# Altium PCB PCB1.PcbDoc (part 3 of 12)
Units mm, origin at the board's own origin, x right, y up, seen from the top; angles counter-clockwise.
Board outline 122.17 x 121.67 mm, 2 copper layers (Top Layer, Bottom Layer); 274 components, 225 nets, 941 pads, 421 vias.
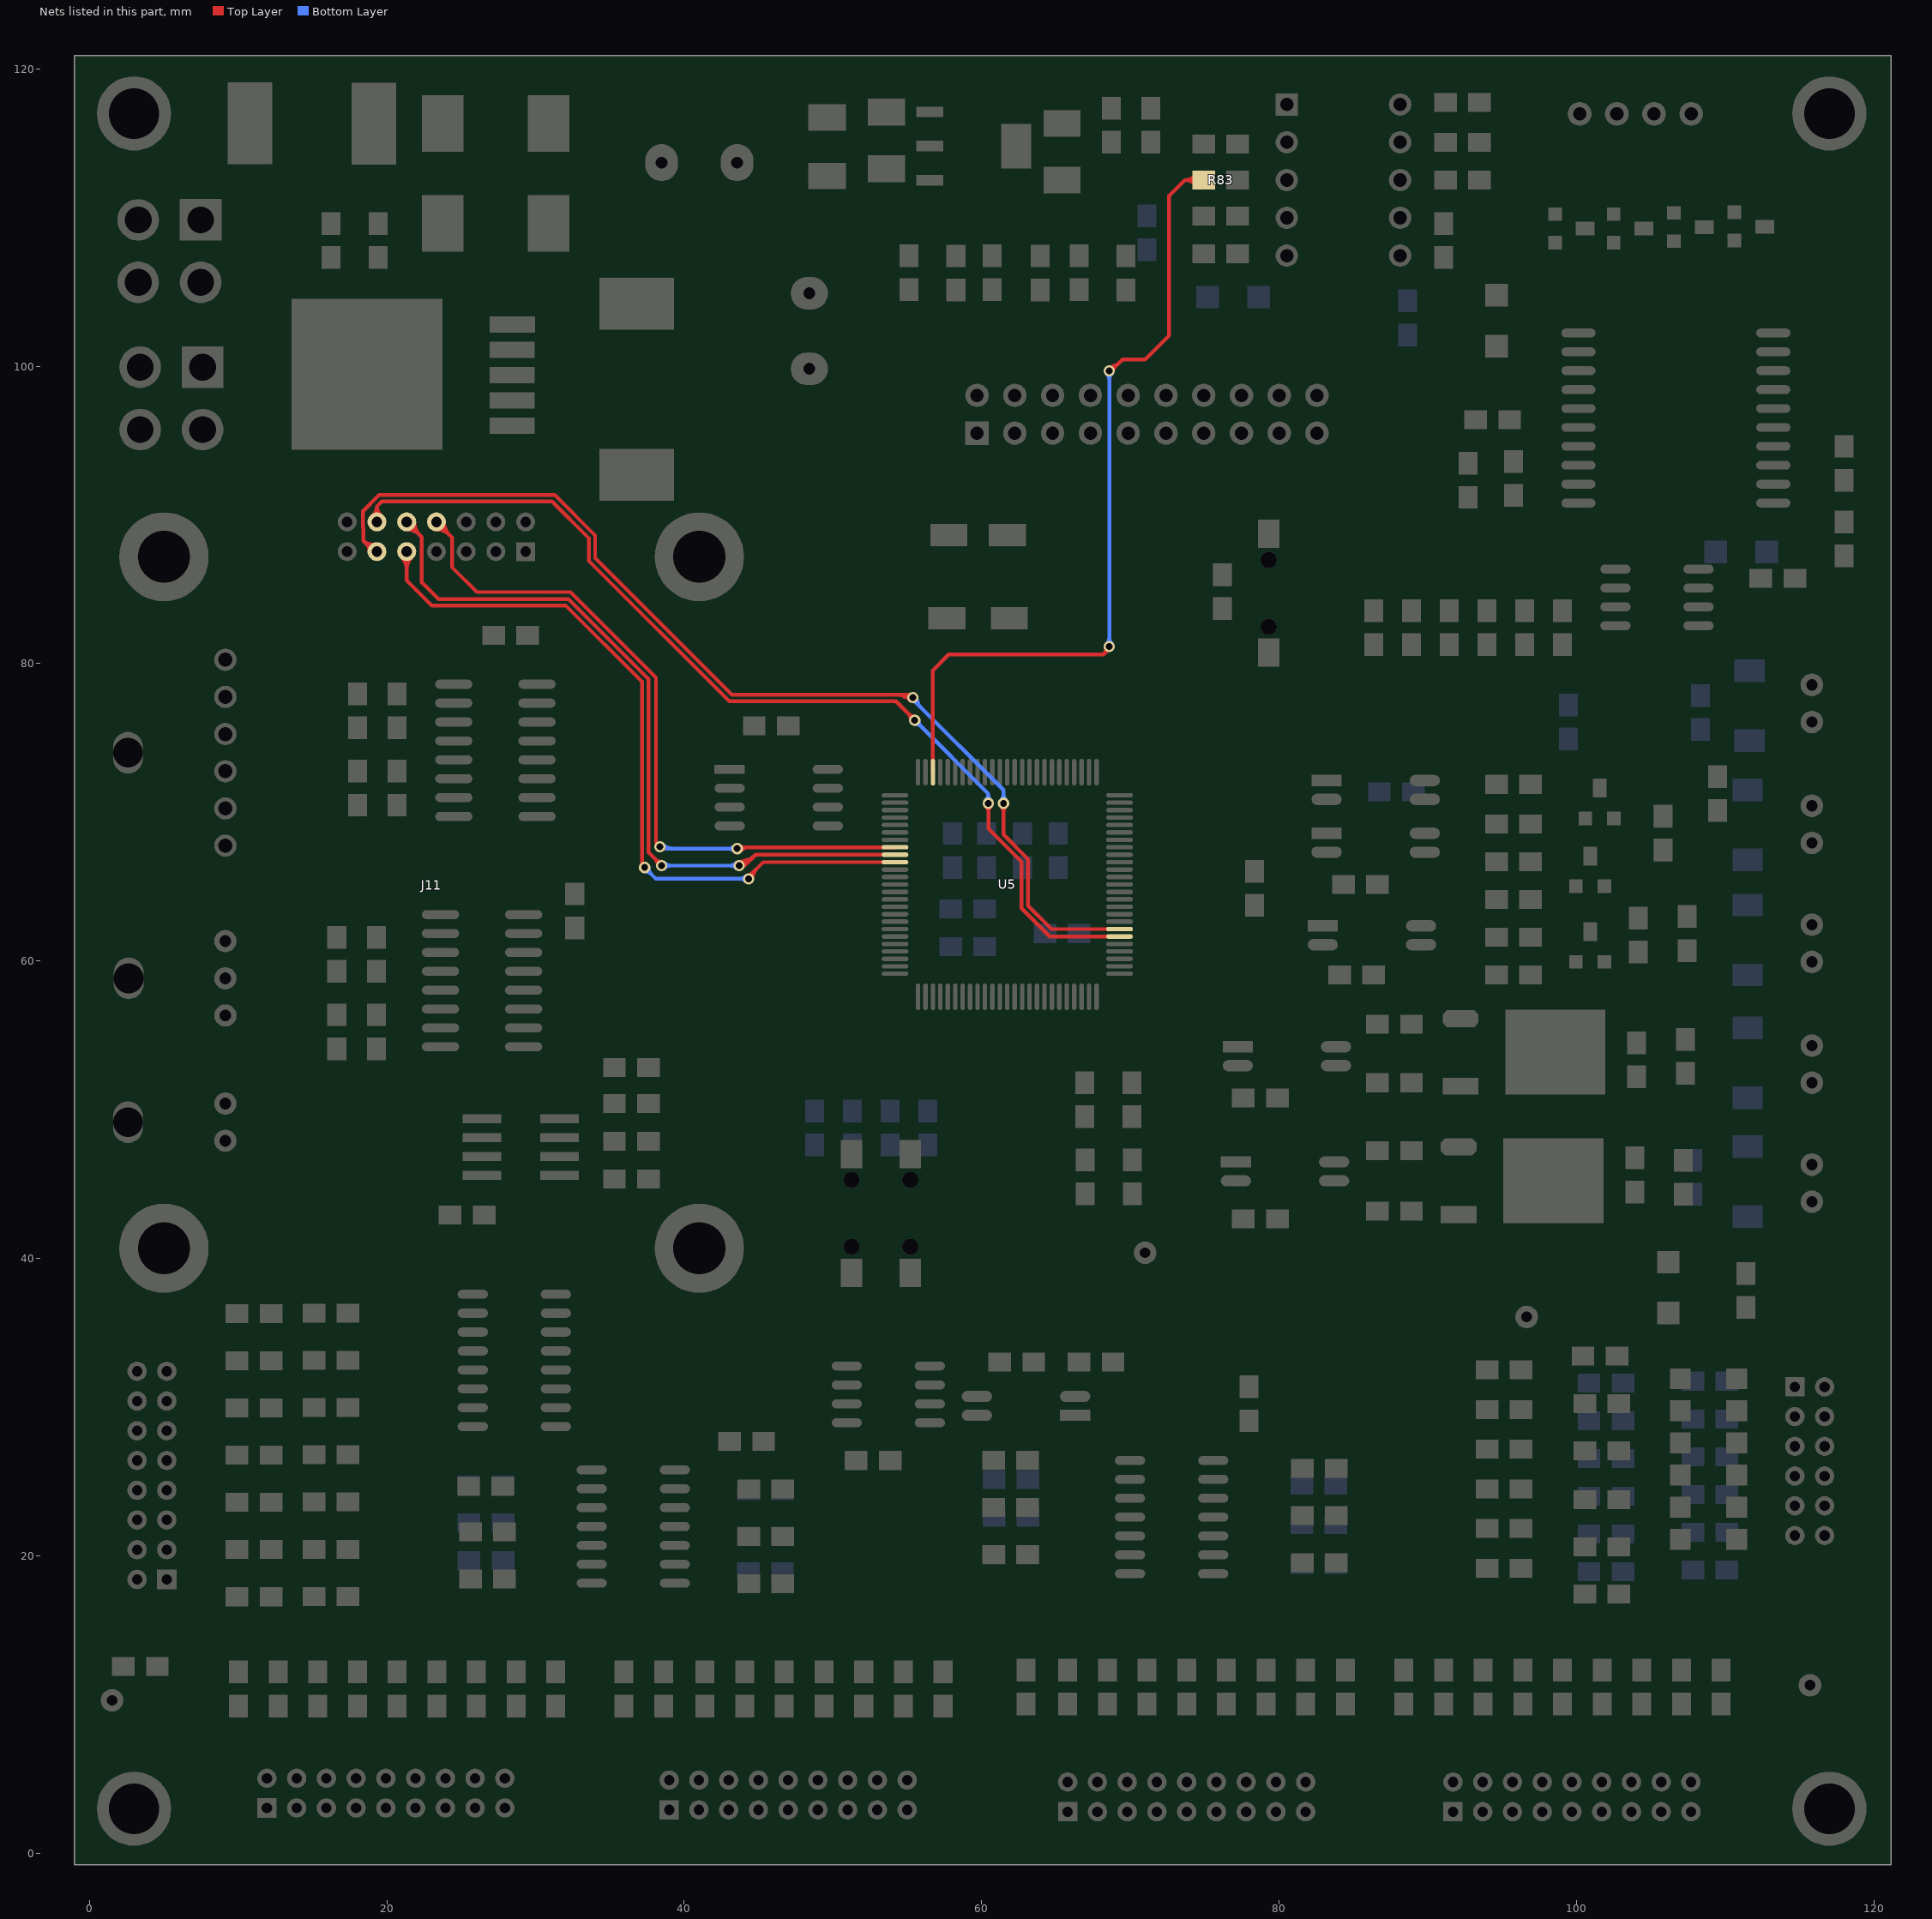
[diagram p3: the nets of this part, all layers, seen from the top]

## Via types
v1: diameter 0.762, hole 0.457, Top Layer to Bottom Layer, 339 vias
v2: diameter 1.27, hole 0.457, Top Layer to Bottom Layer, 39 vias
v3: diameter 0.889, hole 0.457, Top Layer to Bottom Layer, 21 vias
v4: diameter 1.27, hole 0.711, Top Layer to Bottom Layer, 12 vias
v5: diameter 1.524, hole 0.711, Top Layer to Bottom Layer, 5 vias
v6: diameter 1.016, hole 0.457, Top Layer to Bottom Layer, 3 vias
v7: diameter 0.711, hole 0.457, Top Layer to Bottom Layer, 1 vias
v8: diameter 1.524, hole 0.457, Top Layer to Bottom Layer, 1 vias

## Nets (pads, with @x,y where several pads share a name; then routed paths per layer and width w, separated by ;. In a path a pad name is that pad's centre, name@x,y a point inside that pad or via, vN(x,y) a via of type N, cw(c..) or ccw(c..) an arc to the next point about the centre after c; other vN are vias at no path point) (continued)
G: R83.1 U5.23 | length 78.9
  Top Layer w0.254: U5.23@56.722,72.701 56.722,79.557 57.785,80.62 68.199,80.62 ; v1@68.58,81.001 68.199,80.62 ; v1@68.58,99.568 69.469,100.457 70.993,100.457 72.593,102.057 72.593,111.455 73.66,112.522 ; R83.1@74.93,112.522 73.66,112.522 ; 68.199,80.62 ccw(c67.842,80.976) v1@68.333,81.094 ; 68.199,80.62 ccw(c67.842,80.976) v1@68.333,81.094 ; 68.199,80.62 ccw(c67.842,80.976) v1@68.333,81.094 ; 68.199,80.62 ccw(c67.842,80.976) v1@68.333,81.094 ; v1(68.58,99.695) cw(c69.126,99.492) 68.975,100.055 ; v1(68.58,99.695) cw(c69.126,99.492) 68.975,100.055 ; v1(68.58,99.695) cw(c69.126,99.492) 68.975,100.055 ; v1(68.58,99.695) cw(c69.126,99.492) 68.975,100.055 ; v1(68.58,99.695) cw(c69.126,99.492) 68.975,100.055 ; v1(68.58,99.695) cw(c69.126,99.492) 68.975,100.055 ; v1@68.58,99.949 ccw(c68.58,100.869) 69.23,100.218 ; v1@68.58,99.949 ccw(c68.58,100.869) 69.23,100.218 ; v1@68.58,99.949 ccw(c68.58,100.869) 69.23,100.218 ; v1@68.58,99.949 ccw(c68.58,100.869) 69.23,100.218 ; v1@68.834,99.695 cw(c69.141,99.695) 68.924,99.912 ; v1@68.834,99.695 cw(c69.141,99.695) 68.924,99.912 ; v1@68.834,99.695 cw(c69.141,99.695) 68.924,99.912 ; v1@68.834,99.695 cw(c69.141,99.695) 68.924,99.912 ; 73.66,112.522 cw(c73.66,111.49) R83.1@74.426,112.182 ; 73.66,112.522 ccw(c73.66,113.554) R83.1@74.426,112.862 ; 73.66,112.522 cw(c73.66,111.49) R83.1@74.426,112.182 ; 73.66,112.522 ccw(c73.66,113.554) R83.1@74.426,112.862 ; 73.66,112.522 cw(c73.66,111.49) R83.1@74.426,112.182 ; 73.66,112.522 ccw(c73.66,113.554) R83.1@74.426,112.862 ; 73.66,112.522 cw(c73.66,111.49) R83.1@74.426,112.182 ; 73.66,112.522 ccw(c73.66,113.554) R83.1@74.426,112.862
  Bottom Layer w0.254: v1(68.58,81.153) v1(68.58,99.695) ; v1@68.4,81.333 ccw(c67.967,81.766) 68.58,81.766 ; v1@68.4,81.333 ccw(c67.967,81.766) 68.58,81.766 ; v1@68.4,81.333 ccw(c67.967,81.766) 68.58,81.766 ; v1@68.4,81.333 ccw(c67.967,81.766) 68.58,81.766 ; v1@68.4,99.515 cw(c67.967,99.082) 68.58,99.082 ; v1@68.4,99.515 cw(c67.967,99.082) 68.58,99.082 ; v1@68.4,99.515 cw(c67.967,99.082) 68.58,99.082 ; v1@68.4,99.515 cw(c67.967,99.082) 68.58,99.082 ; 68.58,81.766 ccw(c69.193,81.766) v1@68.76,81.333 ; 68.58,81.766 ccw(c69.193,81.766) v1@68.76,81.333 ; 68.58,81.766 ccw(c69.193,81.766) v1@68.76,81.333 ; 68.58,81.766 ccw(c69.193,81.766) v1@68.76,81.333 ; 68.58,99.082 cw(c69.193,99.082) v1@68.76,99.515 ; 68.58,99.082 cw(c69.193,99.082) v1@68.76,99.515 ; 68.58,99.082 cw(c69.193,99.082) v1@68.76,99.515 ; 68.58,99.082 cw(c69.193,99.082) v1@68.76,99.515
G1: J11.8 U5.33 | length 59.1
  Top Layer w0.254: J11.8@23.622,89.535 J11.8@23.337,89.535 ; 23.977,88.856 cw(c24.207,89.713) J11.8@23.337,89.535 ; 24.016,88.895 ccw(c23.159,88.665) J11.8@23.337,89.535 ; v1(38.354,67.691) 38.1,67.945 38.1,79.068 32.357,84.811 26.06,84.811 24.384,86.487 24.384,88.488 J11.8@23.337,89.535 ; v1@38.608,67.564 v1@38.608,67.691 ; v1(43.561,67.564) 43.648,67.651 U5.33@54.172,67.651 ; 24.204,88.668 cw(c25.071,89.535) 23.845,89.535 ccw(c25.071,89.535) 24.204,88.668 ; 24.204,88.668 ccw(c23.337,87.801) 23.337,89.027 cw(c23.337,87.801) 24.204,88.668 ; v1@43.741,67.384 cw(c44.384,66.741) 44.384,67.651 ccw(c44.384,66.741) v1@43.741,67.384 ; v1@43.741,67.744 ccw(c43.964,67.967) 43.964,67.651 cw(c43.964,67.967) v1@43.741,67.744
  Bottom Layer w0.254: v1@38.608,67.564 v1(43.561,67.564) ; 42.948,67.564 cw(c42.948,66.951) 43.381,67.384 ccw(c42.948,66.951) 42.948,67.564 ; 42.948,67.564 ccw(c42.948,68.177) 43.381,67.744 cw(c42.948,68.177) 42.948,67.564 ; v1@38.534,67.871 ccw(c39.274,68.611) 39.274,67.564 cw(c39.274,68.611) v1@38.534,67.871
G2: J11.10 U5.34 | length 68.9
  Top Layer w0.254: 21.977,88.856 cw(c22.207,89.713) J11.10@21.337,89.535 ; 22.016,88.895 ccw(c21.159,88.665) J11.10@21.337,89.535 ; 31.115,84.379 31.165,84.329 ; 38.141,66.741 ccw(c38.57,66.856) v1(38.481,66.421) ; 38.161,66.761 cw(c38.046,66.332) v1(38.481,66.421) ; v1@43.855,66.612 ccw(c44.065,66.853) 44.148,66.544 ccw(c44.231,66.236) v1@43.928,66.339 ; v1@43.942,66.421 44.069,66.421 44.799,67.151 U5.34@54.172,67.151 ; 44.197,66.811 ccw(c44.413,66.002) v1(43.688,66.421) ; J11.10@21.337,89.535 22.352,88.52 22.352,85.471 23.494,84.329 31.165,84.329 ; 22.204,88.668 cw(c23.071,89.535) 21.845,89.535 ccw(c23.071,89.535) 22.204,88.668 ; 22.204,88.668 ccw(c21.337,87.801) 21.337,89.027 cw(c21.337,87.801) 22.204,88.668 ; 31.165,84.329 32.228,84.329 37.592,78.965 37.592,67.31 v1(38.481,66.421) ; 38.047,66.855 cw(c37.614,66.421) 38.227,66.421 ccw(c37.614,66.421) 38.047,66.855 ; 38.047,66.855 ccw(c38.481,67.288) 38.481,66.675 cw(c38.481,67.288) 38.047,66.855 ; v1(43.688,66.421) ccw(c43.688,67.341) 44.338,66.69 cw(c43.688,67.341) v1(43.688,66.421) ; v1@43.688,66.675 ccw(c43.688,68.208) 44.772,67.124 cw(c43.688,68.208) v1@43.688,66.675
  Bottom Layer w0.254: v1(38.481,66.421) v1(43.688,66.421) ; 39.094,66.421 cw(c39.094,67.034) 38.661,66.601 ccw(c39.094,67.034) 39.094,66.421 ; 39.094,66.421 ccw(c39.094,65.808) 38.661,66.241 cw(c39.094,65.808) 39.094,66.421 ; 43.075,66.421 cw(c43.075,65.808) 43.508,66.241 ccw(c43.075,65.808) 43.075,66.421 ; 43.075,66.421 ccw(c43.075,67.034) 43.508,66.601 cw(c43.075,67.034) 43.075,66.421
G3: J11.9 U5.35 | length 61
  Top Layer w0.254: J11.9@21.337,87.535 21.337,85.597 23.037,83.897 32.05,83.897 37.16,78.787 37.16,66.472 v1(37.338,66.294) ; v1@44.259,65.596 45.315,66.651 U5.35@54.172,66.651 ; v1(44.323,65.532) ccw(c44.12,66.078) 44.683,65.927 ; 21.337,86.309 cw(c22.563,86.309) 21.696,87.176 ccw(c22.563,86.309) 21.337,86.309 ; 21.337,86.309 ccw(c20.111,86.309) 20.978,87.176 cw(c20.111,86.309) 21.337,86.309 ; v1@44.323,65.786 ccw(c44.323,66.093) 44.54,65.876 cw(c44.323,66.093) v1@44.323,65.786 ; v1@44.577,65.532 cw(c45.497,65.532) 44.846,66.182 ccw(c45.497,65.532) v1@44.577,65.532
  Bottom Layer w0.254: v1(37.338,66.294) 38.1,65.532 v1(44.323,65.532) ; 37.772,65.86 cw(c38.205,66.294) 37.592,66.294 ccw(c38.205,66.294) 37.772,65.86 ; 37.772,65.86 ccw(c37.338,65.427) 37.338,66.04 cw(c37.338,65.427) 37.772,65.86 ; 43.71,65.532 cw(c43.71,64.919) 44.143,65.352 ccw(c43.71,64.919) 43.71,65.532 ; 43.71,65.532 ccw(c43.71,66.145) 44.143,65.712 cw(c43.71,66.145) 43.71,65.532
G4: J11.11 U5.82 | length 85.3
  Top Layer w0.254: 18.786,88.048 cw(c18.743,86.987) J11.11@19.524,87.707 ; 18.796,87.884 18.415,88.265 ; 54.768,77.789 ccw(c54.921,78.053) v1@55.167,77.874 ; v1(61.468,70.612) 61.468,68.505 63.119,66.854 63.119,63.73 64.698,62.151 U5.82@69.272,62.151 ; 18.415,88.265 ccw(c19.033,88.883) 19.225,88.031 cw(c19.033,88.883) 18.415,88.265 ; 18.415,88.265 18.415,89.128 18.397,89.146 18.397,90.255 19.481,91.338 31.295,91.338 34.011,88.623 34.011,87.099 43.208,77.902 55.194,77.902 v1(55.372,77.724) ; v1(55.372,77.724) ccw(c54.943,77.295) 54.943,77.902 cw(c54.943,77.295) v1(55.372,77.724) ; 61.468,69.999 cw(c62.081,69.999) 61.648,70.432 ccw(c62.081,69.999) 61.468,69.999 ; 61.468,69.999 ccw(c60.855,69.999) 61.288,70.432 cw(c60.855,69.999) 61.468,69.999 ; 18.606,88.074 cw(c18.066,87.535) 18.829,87.535 ccw(c18.066,87.535) 18.606,88.074 ; 18.741,87.939 ccw(c19.153,88.351) 19.281,87.783 cw(c19.153,88.351) 18.741,87.939 ; 54.33,77.902 cw(c54.33,76.682) 55.192,77.544 ccw(c54.33,76.682) 54.33,77.902
  Bottom Layer w0.254: v1@55.245,77.851 v1(55.372,77.724) ; 55.732,77.329 ccw(c55.169,77.178) v1(55.372,77.724) ; v1(61.468,70.612) 61.468,71.501 55.372,77.597 v1(55.372,77.724) ; 61.468,71.225 cw(c60.855,71.225) 61.288,70.792 ccw(c60.855,71.225) 61.468,71.225 ; 61.468,71.225 ccw(c62.081,71.225) 61.648,70.792 cw(c62.081,71.225) 61.468,71.225 ; v1@55.372,77.47 cw(c55.372,77.163) 55.589,77.38 ccw(c55.372,77.163) v1@55.372,77.47 ; v1@55.626,77.724 ccw(c56.546,77.724) 55.895,77.074 cw(c56.546,77.724) v1@55.626,77.724
G5: J11.12 U5.81 | length 78.7
  Top Layer w0.254: J11.12@19.337,89.535 19.337,90.584 ; 55.159,76.52 ccw(c55.588,76.635) v1(55.499,76.2) ; 55.179,76.54 cw(c55.064,76.111) v1(55.499,76.2) ; v1@60.452,70.358 60.452,68.91 62.687,66.675 62.687,63.551 64.587,61.651 U5.81@69.272,61.651 ; 19.337,90.584 cw(c18.508,90.584) 19.022,89.934 ccw(c18.508,90.584) 19.337,90.584 ; 19.337,90.584 ccw(c20.166,90.584) 19.652,89.934 cw(c20.166,90.584) 19.337,90.584 ; 19.337,90.584 19.66,90.907 31.116,90.907 33.579,88.444 33.579,86.92 43.029,77.47 54.229,77.47 v1(55.499,76.2) ; 55.065,76.634 cw(c54.632,76.2) 55.245,76.2 ccw(c54.632,76.2) 55.065,76.634 ; 55.065,76.634 ccw(c55.499,77.067) 55.499,76.454 cw(c55.499,77.067) 55.065,76.634 ; v1@60.264,70.432 cw(c59.811,69.979) 60.452,69.979 ccw(c59.811,69.979) v1@60.264,70.432 ; 60.452,70.018 cw(c61.038,70.018) 60.624,70.432 ccw(c61.038,70.018) 60.452,70.018
  Bottom Layer w0.254: v1(55.499,76.2) 60.444,71.255 v1(60.444,70.612) ; 55.933,75.766 cw(c56.366,76.2) 55.753,76.2 ccw(c56.366,76.2) 55.933,75.766 ; 55.933,75.766 ccw(c55.499,75.333) 55.499,75.946 cw(c55.499,75.333) 55.933,75.766 ; 60.444,71.225 cw(c59.831,71.225) 60.264,70.792 ccw(c59.831,71.225) 60.444,71.225 ; 60.444,71.225 ccw(c61.057,71.225) 60.624,70.792 cw(c61.057,71.225) 60.444,71.225

## Text inside footprints (layer, text, board x,y; h text height)
J1: Top Overlay "16" at 3.683,14.097 h1.27 r90; Top Overlay "15" at 6.223,13.97 h1.27 r90; Top Overlay "1" at 6.096,35.306 h1.27 r90; Top Overlay "2" at 3.81,35.052 h1.27 r90
J4: Top Overlay "18" at 87.249,4.318 h1.27; Top Overlay "17" at 87.122,2.032 h1.27; Top Overlay "1" at 110.744,1.651 h1.27; Top Overlay "2" at 110.49,4.445 h1.27
J5: Top Overlay "18" at 61.341,4.318 h1.27; Top Overlay "17" at 61.214,2.032 h1.27; Top Overlay "1" at 84.836,1.651 h1.27; Top Overlay "2" at 84.582,4.445 h1.27
J6: Top Overlay "18" at 34.544,4.445 h1.27; Top Overlay "17" at 34.417,2.159 h1.27; Top Overlay "1" at 58.039,1.778 h1.27; Top Overlay "2" at 57.785,4.572 h1.27
J8: Top Overlay "18" at 7.493,4.572 h1.27; Top Overlay "17" at 7.366,2.286 h1.27; Top Overlay "1" at 30.988,1.905 h1.27; Top Overlay "2" at 30.734,4.699 h1.27
J18: Top Overlay "1" at 109.745,116.452 h1.02
J20: Top Overlay "2" at 116.205,18.669 h1.27 r270; Top Overlay "1" at 114.173,18.415 h1.27 r270; Top Overlay "11" at 114.046,35.433 h1.27 r270; Top Overlay "12" at 116.332,35.56 h1.27 r270